# Altium PCB PCB.REV6.PcbDoc
Units mm, origin at the board's own origin, x right, y up, seen from the top; angles counter-clockwise.
Board outline 68.25 x 58.25 mm, 2 copper layers (Top Layer, Bottom Layer); 30 components, 21 nets, 87 pads, 1 vias.
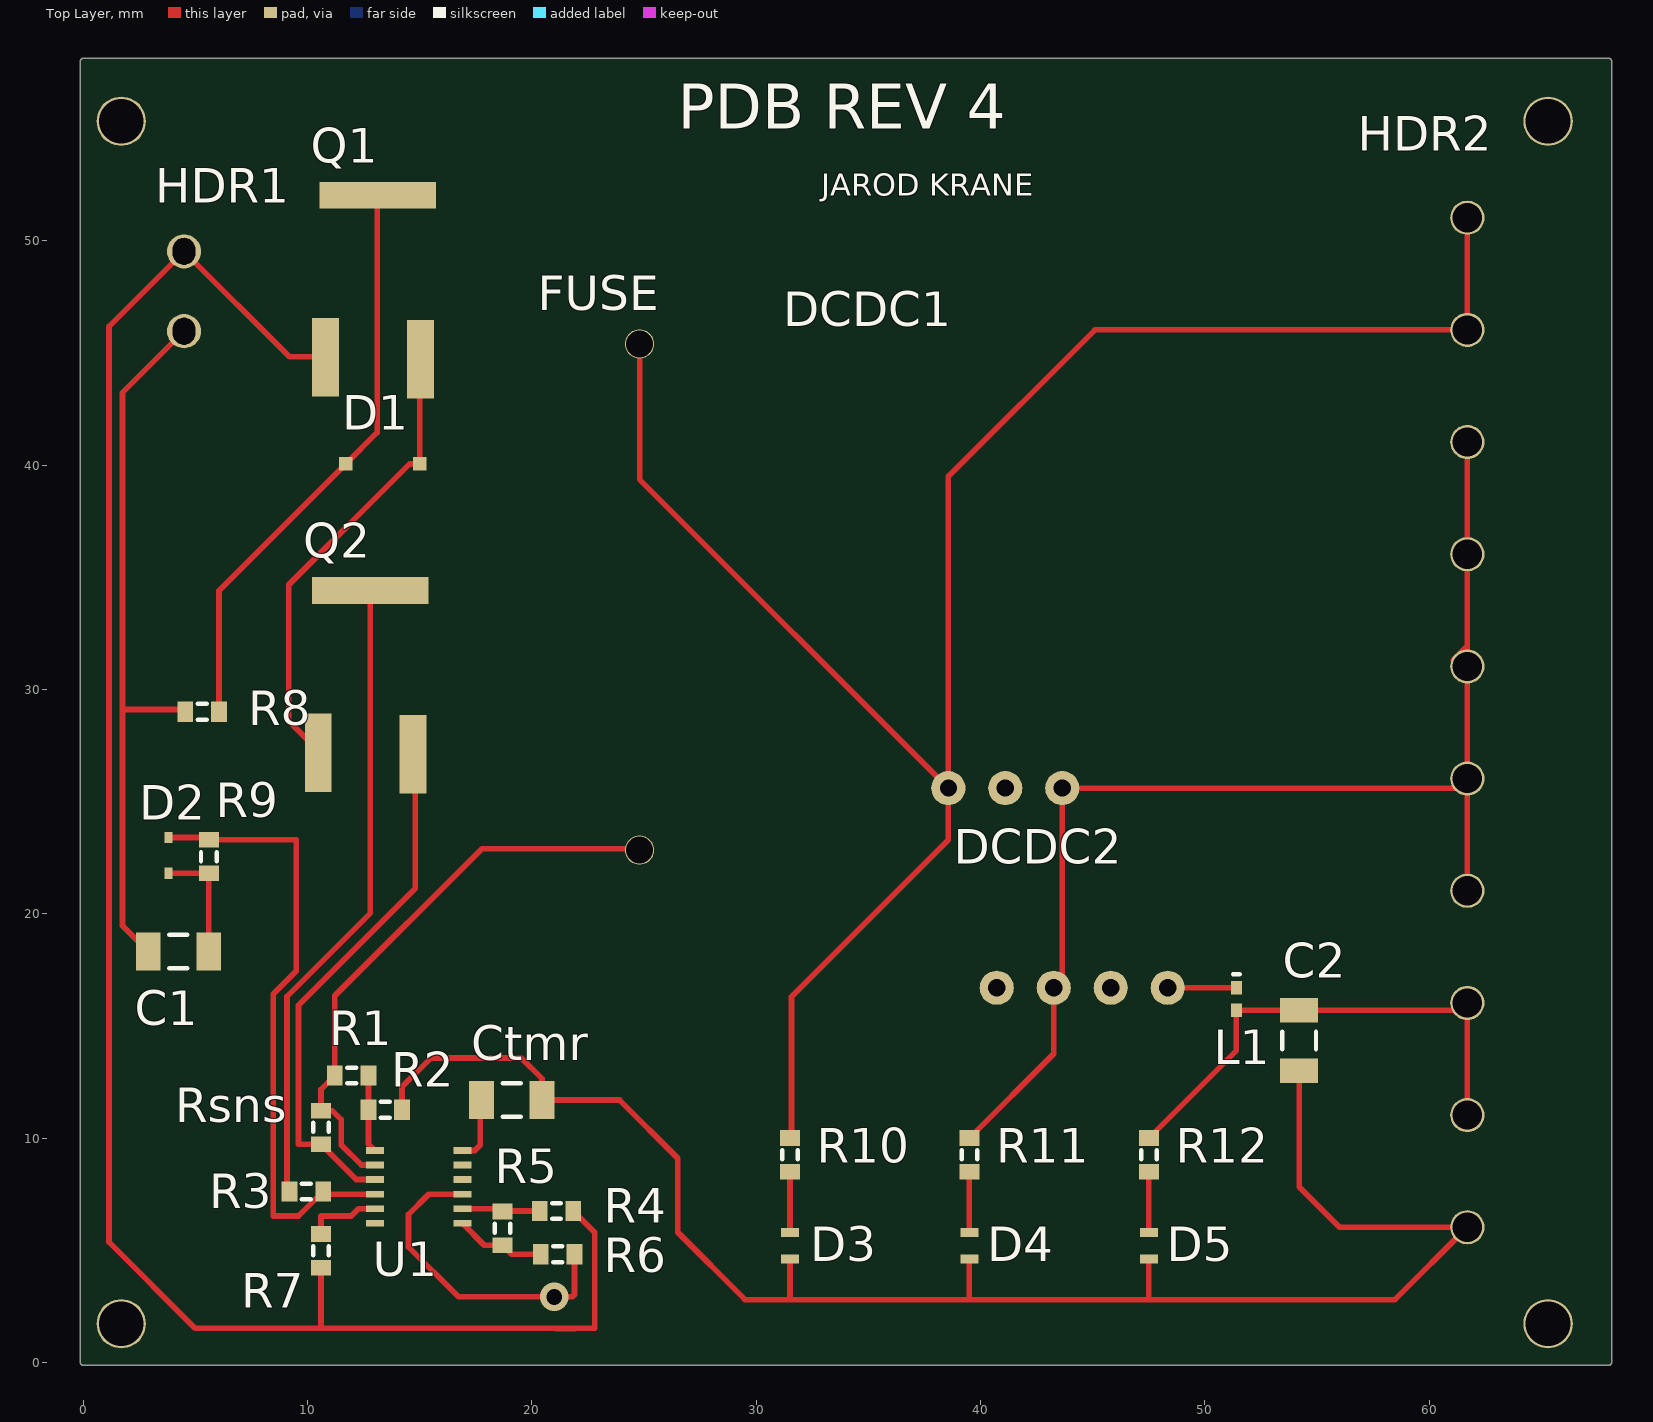
[diagram p0: Top Layer view]
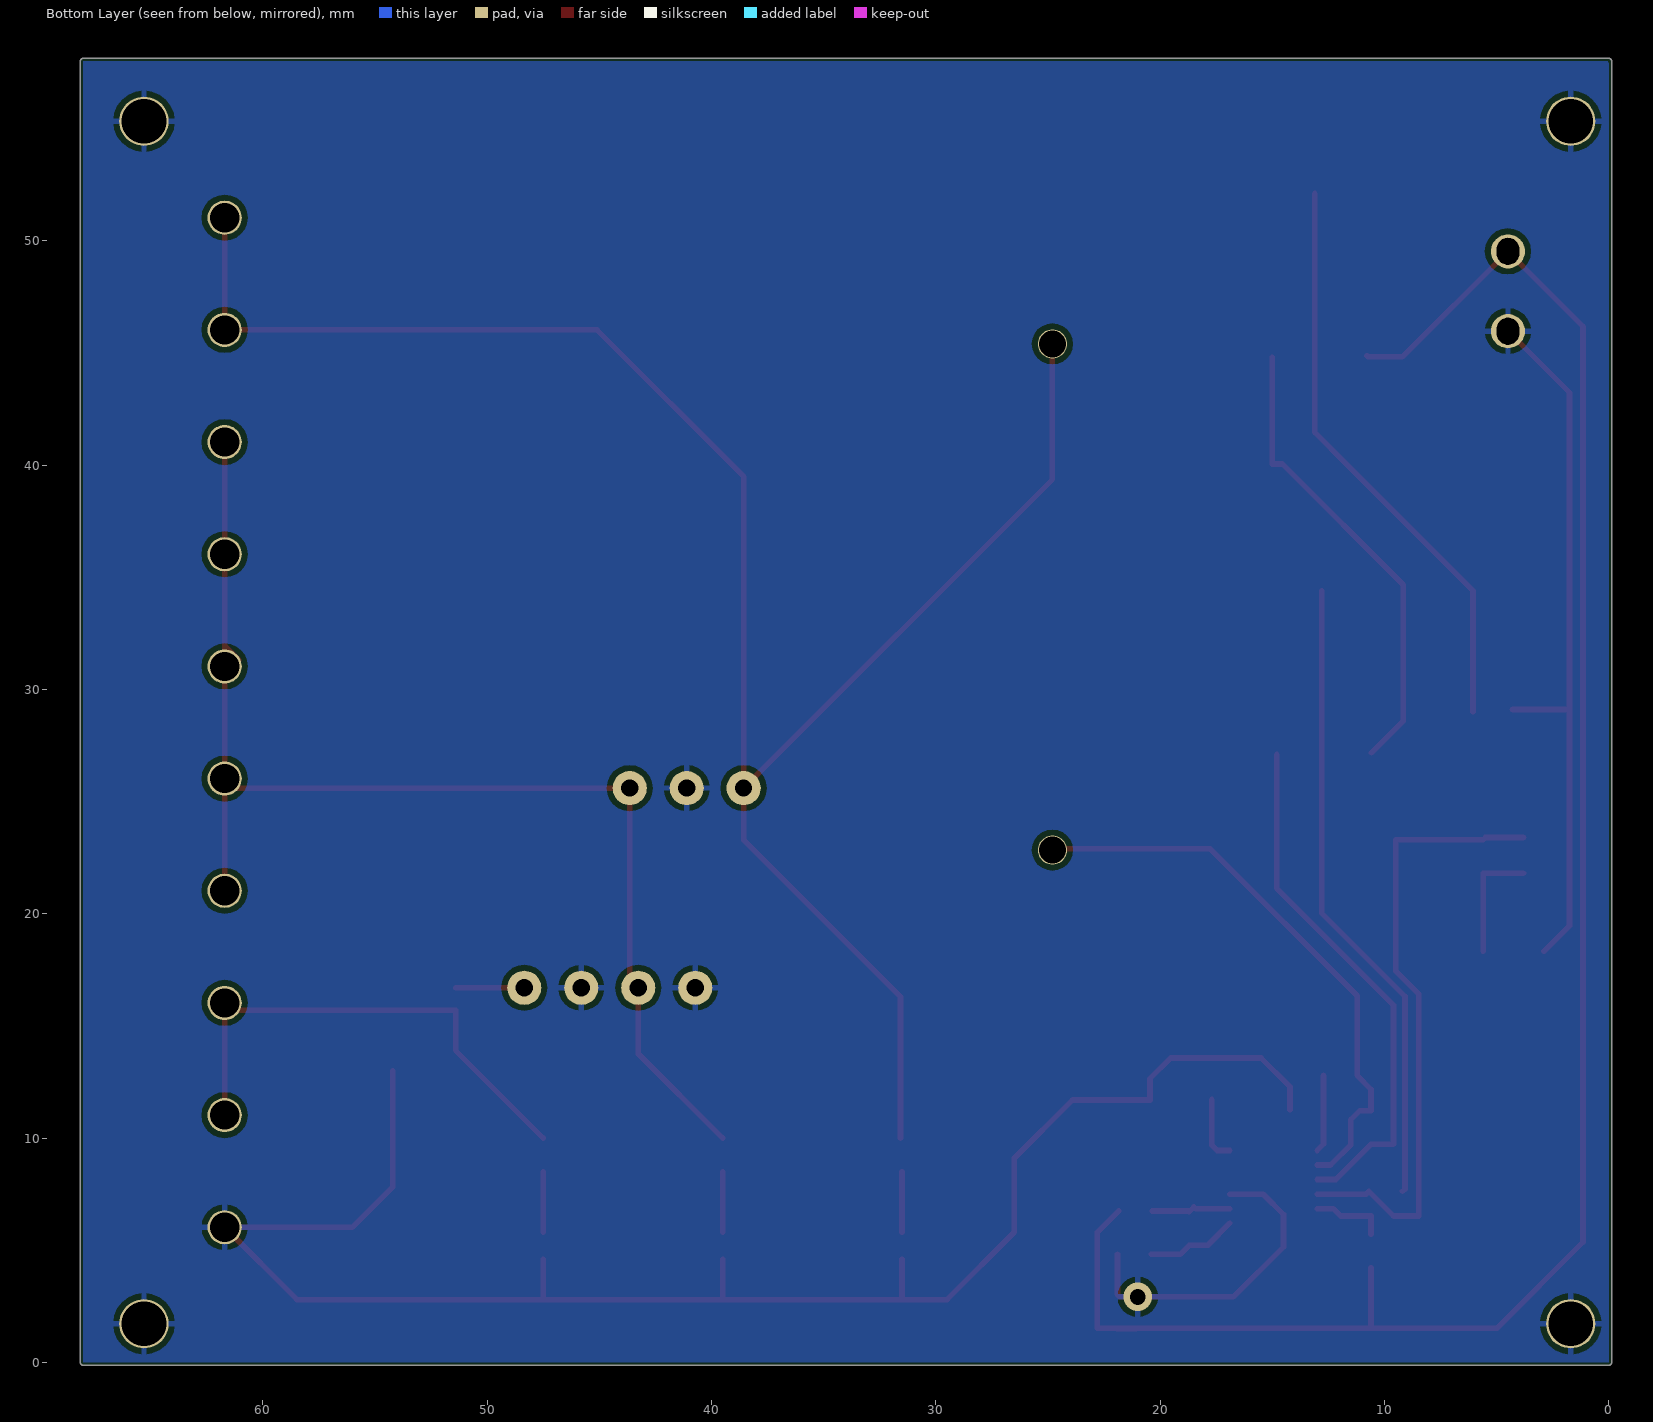
[diagram p1: Bottom Layer view, seen from below]

## Layer stack, top to bottom
Top Solder: solder mask 0.0102, Solder Resist, Dk 3.5
Top Layer: signal copper 0.0356
Dielectric 1: dielectric 0.32, FR-4, Dk 4.8
Bottom Layer: signal copper 0.0356
Bottom Solder: solder mask 0.0102, Solder Resist, Dk 3.5

## Board outline
0,-0.127 cw(c0,0) -0.127,0 -0.127,58 cw(c0,58) 0,58.127 68,58.127 cw(c68,58) 68.127,58 68.127,0 cw(c68,0) 68,-0.127

## Design rules (kind name [scope] priority, off if disabled: settings)
Clearance [All] p1: gap=0.254 ignorepadtopadclearanceinfootprint=FALSE except(0: Arc-Hole Track-Hole SMDPad-Hole THPad-Hole Via-Hole Fill-Hole Poly-Hole Region-Hole Text-Hole)
PolygonConnect [All] p1: connectstyle=Relief reliefconductorwidth=0.254 reliefentries=4 polygonreliefangle="90 Angle" airgapwidth=0.254
RoutingVias [All] p1: holewidth=0.711 width=1.27 viastyle="Through Hole" minholewidth=0.711 minwidth=1.27 maxholewidth=0.711 maxwidth=1.27
SolderMaskExpansion [All] p1: expansion=0.102
Width [All] p1: maxlimit=0.254 minlimit=0.254 preferedwidth=0.254
30 further rules are at their usual default settings.

## Components (designator, comment, footprint, x,y, rotation, side; value= is the part's Value field where it differs from the comment)
C1 "Cap Semi" C1206 4.245,18.324 r0 top value=100pF
C2 "Cap Semi" C1206 54.2,14.35 r90 top value=100pF
Ctmr "Cap Semi" C1206 19.1,11.7 r180 top value=100pF
D1 "D Zener" "ZENER DIODE" 14.7,39.3 r90 top
D2 "Diode" diode 3.4,22 r0 top
D3 "LED1" LED 31.9,6 r180 top
D4 "LED2" LED 39.9,6 r180 top
D5 "LED3" LED 47.9,6 r180 top
DCDC1 "DCDC1" DCDC1 31.448,23.568 r0 top
DCDC2 "DCDC2" DCDC2 38.561,15.43 r0 top
FUSE "FUSE" FUSE 28.737,22.2 r90 top
HDR1 "HDR1" HDR1 1.066,44.19 r0 top
HDR2 "HDR2" HDR2 56.595,3.524 r0 top
L1 "Inductor" 0402-A 51.4,16.2 r270 top value=10mH
Q1 "MOSFET-P" MOSFET 9.875,45.75 r0 top
Q2 "MOSFET-N" MOSFET 9.55,28.125 r0 top
R1 "" J1-0603 11.963,12.789 r0 top value=1K
R2 "" J1-0603 13.463,11.265 r0 top value=1K
R3 "" J1-0603 9.945,7.624 r0 top value=1K
R4 "" J1-0603 21.096,6.748 r0 top value=1K
R5 "" J1-0603 18.695,5.974 r90 top value=1K
R6 "" J1-0603 21.145,4.824 r180 top value=1K
R7 "" J1-0603 10.595,4.974 r90 top value=1K
R8 "" J1-0603 5.3,29 r0 top value=1K
R9 "" J1-0603 5.6,22.55 r90 top value=1K
R10 "" J1-0603 31.5,9.25 r90 top value=1K
R11 "" J1-0603 39.5,9.25 r90 top value=1K
R12 "" J1-0603 47.5,9.25 r90 top value=1K
Rsns "" J1-0603 10.595,10.474 r90 top value=1K
U1 "LT4363" LT4363 12.5,5.794 r0 top

## Footprints (in the part's own frame and the unit in brackets; to place one, negate y for a bottom-side part, rotate by r counter-clockwise, add the part's x,y. Pads: shape width x height; smd on the part's side, far side on the other; paste and mask are expansions set on the pad)
0402-A [mm] "Chip Inductor, Body 1.0x0.5mm, IPC High Density"
  rect 0.6x0.5 smd: 1(-0.5,0) 2(0.5,0)
  silkscreen extent -1.1,-0.15 -1.1,0.15, body extent -0.55,-0.3 0.55,0.3, height 0.55
C1206 [mm] "Chip Capacitor, Body 3.2x1.6mm, IPC High Density"
  rect 1.1x1.7 smd: 1(-1.35,0) 2(1.35,0)
  silkscreen extent -0.4,-0.75 0.4,0.75, body extent -1.7,-0.9 1.7,0.9, height 1.3
DCDC1 [mil]
  round 60 hole 30: 1(280,80) 2(380,80) 3(480,80)
  body extent -20,10 780,860, height 323
DCDC2 [mil]
  round 60 hole 30: 1(85,50) 2(185,50) 3(285,50) 4(385,50)
  body extent -1,0 452,237, height 298
diode [mm] "1N4148X"
  rect 0.35x0.5 smd: 1(0.4,1.4) 2(0.4,-0.2)
  body extent 0,0 0.8,1.2, height 0.6
FUSE [mm]
  round 1.3 hole 1.2: 1(0.635,3.937) 2(23.2,3.937)
  body extent 0.38,-0.86 23.48,8.74, height 11.6
HDR1 [mil]
  round 60 hole 39.37 slot 47.24 at 90 deg: 1(135,70) 2(135,210)
  body extent -2,0 285,280, height 335
HDR2 [mm]
  round 1.524 hole 1.3: 1(5.1,47.5) 2(5.1,42.5) 3(5.1,37.5) 4(5.1,32.5) 5(5.1,27.5) 6(5.1,22.5) 7(5.1,17.5) 8(5.1,12.5) 9(5.1,7.5) 10(5.1,2.5)
  body extent 0,0 9.91,50.01, height 14.6
J1-0603 [mm] "Chip Resistor, Body 1.6x0.8mm, IPC High Density"
  rect 0.7x0.9 smd: 1(-0.75,0) 2(0.75,0)
  silkscreen extent -0.2,-0.35 0.2,0.35, body extent -0.85,-0.48 0.85,0.48, height 0.9
LED [mm]
  rect 0.8x0.4 smd: 1(0.4,0.2) 2(0.4,1.4)
  body extent 0,0 0.8,1.6, height 0.51
LT4363 [mm]
  rect 0.8x0.3 smd: 1(0.5,3.656) 2(0.5,3.006) 3(0.5,2.356) 4(0.5,1.706) 5(0.5,1.056) 6(0.5,0.406) 7(4.4,0.406) 8(4.4,1.056) 9(4.4,1.706) 10(4.4,2.356) 11(4.4,3.006) 12(4.4,3.656)
  body extent 0.9,0 4,4.1, height 0.87
MOSFET [mm]
  rect 1.2x3.5 smd: 1(0.925,-0.95) 3(5.15,-1.025)
  rect 5.2x1.2 smd: 2(3.25,6.275)
  body extent 0,0.03 6.5,6, height 2.2
"ZENER DIODE" [mm] "BZT52C36-FDICT-ND"
  rect 0.6x0.6 smd: 1(0.75,3) 2(0.75,-0.3)
  body extent 0,0 1.5,2.7, height 1

## Part data
C1 C2 Ctmr: "Capacitor (Semiconductor SIM Model)", LatestRevisionDate=29-May-2009, LatestRevisionNote="IPC-7351 Footprint Added.", PackageDescription="Chip Capacitor", PackageReference=C1206, Published=8-Jun-2000, Publisher="Altium Limited"
D1: "Zener Diode", LatestRevisionDate=17-Jul-2002, LatestRevisionNote="Re-released for DXP Platform.", PackageDescription="Diode, Thru-Hole; 2 Leads; 0.7 in Pin Spacing", PackageReference=DIODE-0.7, Published=8-Jun-2000, Publisher="Altium Limited"
D2: "Default Diode", Code_JEDEC=DO-214-AB, LatestRevisionDate=17-Jul-2002, LatestRevisionNote="Re-released for DXP Platform.", PackageDescription="DO-214-AB/SMC; 2 C-Bend Leads; Body 7.9 x 5.9 mm, inc. leads (LxW)", PackageReference=SMC, PackageVersion=Sep-1996, Published=8-Jun-2000, Publisher="Altium Limited"
D3 D4: library part LED3, "Typical BLUE SiC LED", DatasheetVersion=16-Apr-2002, LatestRevisionDate=17-Dec-2003, LatestRevisionNote="PCB Footprint replaced.", PackageDescription="SM LED; 2 C-Bend Leads; Body 3.5 x 2.8 x 1.9 mm, inc leads (LxWxH typ)", PackageReference=3.5X2.8X1.9, PackageVersion=16-Apr-2002, Published=8-Jun-2000, Publisher="Altium Limited"
D5: "Typical BLUE SiC LED", DatasheetVersion=16-Apr-2002, LatestRevisionDate=17-Dec-2003, LatestRevisionNote="PCB Footprint replaced.", PackageDescription="SM LED; 2 C-Bend Leads; Body 3.5 x 2.8 x 1.9 mm, inc leads (LxWxH typ)", PackageReference=3.5X2.8X1.9, PackageVersion=16-Apr-2002, Published=8-Jun-2000, Publisher="Altium Limited"
Q1: "P-Channel MOSFET", LatestRevisionDate=17-Jul-2002, LatestRevisionNote="Re-released for DXP Platform.", PackageDescription="TO, Flat Index; 3 In-Line, Axial Leads; Body Dia. 4.6mm; Lead Dia. 0.5 mm (max)", PackageReference=E3, PackageVersion=1995/1996, Published=8-Jun-2000, Publisher="Altium Limited"
Q2: "N-Channel MOSFET", LatestRevisionDate=17-Jul-2002, LatestRevisionNote="Re-released for DXP Platform.", PackageDescription="TO, Flat Index; 3 In-Line, Axial Leads; Body Dia. 4.6mm; Lead Dia. 0.5 mm (max)", PackageReference=E3, PackageVersion=1995/1996, Published=8-Jun-2000, Publisher="Altium Limited"
R1 R2 R3 R4 R5 R6 R7 R8 R9 R10 R11 R12 Rsns: library part Res3, "Resistor", LatestRevisionDate=29-May-2009, LatestRevisionNote="IPC-7351 Footprint Added.", PackageDescription="Chip Resistor", PackageReference=J1-0603, Published=8-Jun-2000, Publisher="Altium Limited"
L1: Code_IEC=1005, Code_JEITA=0402, LatestRevisionDate=29-May-2009, LatestRevisionNote="IPC-7351 Footprint Added.", PackageDescription="Chip Inductor", PackageReference=0402-A, Published=8-Jun-2000, Publisher="Altium Limited"

## Free pads (board coordinates)
  round 2.2 hole 2: 1(1.695,1.724) 2(1.695,55.324) 3(65.295,55.324) 4(65.295,1.724)

## Via types
v1: diameter 1.27, hole 0.711, Top Layer to Bottom Layer, 1 vias

## Nets (pads, with @x,y where several pads share a name; then routed paths per layer and width w, separated by ;. In a path a pad name is that pad's centre, name@x,y a point inside that pad or via, vN(x,y) a via of type N, cw(c..) or ccw(c..) an arc to the next point about the centre after c; other vN are vias at no path point)
GND: C1.1 C2.1 Ctmr.1 D3.2 D4.2 D5.2 DCDC1.2 DCDC2.1 DCDC2.3 HDR1.1 HDR2.10 pad.1 pad.2 pad.3 pad.4 R2.2 R6.1 R8.1 U1.9 | length 122.3
  Top Layer w0.254: C1.1 1.754,19.465 1.754,29.1 ; R8.1@4.295,29.1 1.754,29.1 ; HDR1.1 1.754,43.227 1.754,29.1 ; R2.2 14.213,12.287 15.5,13.574 19.526,13.574 20.45,12.65 Ctmr.1 23.9,11.7 26.5,9.1 26.5,5.8 29.5,2.8 31.5,2.8 ; U1.9 15.4,7.5 14.5,6.6 14.5,5.148 16.724,2.924 v1(20.995,2.924) 21.795,2.924 21.895,3.024 R6.1 ; D3.2 31.5,2.8 ; D4.2 39.5,2.8 ; D5.2 47.5,2.8 ; C2.1 54.2,7.819 55.995,6.024 HDR2.10 58.471,2.8 47.5,2.8 ; 31.5,2.8 39.5,2.8 ; 39.5,2.8 47.5,2.8
NetC1_2: C1.2 D2.2 R9.1 | length 5.3
  Top Layer w0.254: D2.2 R9.1 5.6,18.329 C1.2
NetC2_2: C2.2 HDR2.8 HDR2.9 L1.2 R12.2 | length 22.7
  Top Layer w0.254: R12.2 51.4,13.9 L1.2 C2.2 61.371,15.7 HDR2.8 HDR2.9
NetCtmr_2: Ctmr.2 U1.12 | length 2.9
  Top Layer w0.254: U1.12 17.45,9.45 17.695,9.695 Ctmr.2@17.695,11.724
NetD1_1: D1.1 Q1.2 R8.2 | length 26
  Top Layer w0.254: R8.2 6.05,34.4 D1.1 13.1,41.45 Q1.2@13.1,52.1
NetD1_2: D1.2 Q1.3 Q2.1 | length 20.9
  Top Layer w0.254: Q2.1@10.575,27.175 9.161,28.589 9.161,34.661 14.55,40.05 D1.2 Q1.3@15,44.8
NetD2_1: D2.1 R3.2 R9.2 U1.4 | length 28
  Top Layer w0.254: D2.1 5.5,23.4 R9.2 9.495,23.3 9.495,17.442 8.464,16.411 8.464,6.524 9.595,6.524 R3.2 10.819,7.5 U1.4
NetD3_1: D3.1 R10.1 | length 2.7
  Top Layer w0.254: D3.1 R10.1
NetD4_1: D4.1 R11.1 | length 2.7
  Top Layer w0.254: D4.1 R11.1
NetD5_1: D5.1 R12.1 | length 2.7
  Top Layer w0.254: D5.1 R12.1
NetDCDC1_1: DCDC1.1 FUSE.2 HDR2.1 HDR2.2 R10.2 | length 88.7
  Top Layer w0.254: FUSE.2@24.8,45.365 24.8,39.36 DCDC1.1 ; R10.2@31.573,10 31.573,16.3 38.56,23.287 DCDC1.1 ; HDR2.1 HDR2.2 45.095,46.024 38.56,39.489 DCDC1.1
NetDCDC1_3: DCDC1.3 DCDC2.2 HDR2.3 HDR2.4 HDR2.5 HDR2.6 HDR2.7 R11.2 | length 56.4
  Top Layer w0.254: R11.2 43.26,13.76 DCDC2.2 43.64,17.08 DCDC1.3 61.271,25.6 HDR2.6 ; HDR2.5@61.071,31.3 61.695,31.924 ; HDR2.7 HDR2.6 ; HDR2.3 HDR2.4 61.695,31.924 ; HDR2.6 HDR2.5 61.695,31.924
NetDCDC2_4: DCDC2.4 L1.1 | length 3.1
  Top Layer w0.254: DCDC2.4 L1.1
NetFUSE_1: FUSE.1 R1.1 Rsns.2 U1.2 | length 25.6
  Top Layer w0.254: U1.2 12.401,8.8 11.495,9.706 11.495,10.824 11.095,11.224 Rsns.2 10.595,12.171 R1.1 11.213,16.342 17.771,22.9 FUSE.1@24.641,22.9
NetHDR1_2: HDR1.2 Q1.1 R4.2 R7.1 | length 85.4
  Top Layer w0.254: R7.1 10.595,1.524 ; Q1.1@10.775,44.875 10.725,44.825 9.194,44.825 HDR1.2 1.146,46.175 1.146,5.366 4.988,1.524 10.595,1.524 ; R4.2 22.795,5.799 22.795,1.524 21.932,1.524 21.916,1.508 21.074,1.508 21.058,1.524 10.595,1.524
NetQ2_2: Q2.2 R3.1 | length 28.4
  Top Layer w0.254: R3.1 9.087,7.732 9.087,16.316 12.8,20.029 Q2.2
NetQ2_3: Q2.3 Rsns.1 U1.3 | length 23.6
  Top Layer w0.254: U1.3 12.169,8.15 Rsns.1 9.595,9.724 9.595,15.924 14.8,21.129 Q2.3@14.8,27.1
NetR1_2: R1.2 R2.1 U1.1 | length 3.5
  Top Layer w0.254: R1.2 R2.1 12.713,9.737 U1.1
NetR4_1: R4.1 R5.2 U1.8 | length 3.6
  Top Layer w0.254: U1.8 18.421,6.85 18.495,6.924 R5.2 18.719,6.748 R4.1
NetR5_1: R5.1 R6.2 U1.7 | length 4.1
  Top Layer w0.254: U1.7 17.876,5.224 R5.1 19.095,4.824 R6.2
NetR7_2: R7.2 U1.5 | length 3.3
  Top Layer w0.254: R7.2 10.595,6.524 11.944,6.524 12.27,6.85 U1.5
pads on no net: U1.6 U1.10 U1.11

## Polygon pours and split planes (outlines as drawn)
GND on Bottom Layer "GND" (solid, pour order 18): 0,0 0,57.9 -0.1,58 68,58 68,0

## Silkscreen, mask and mechanical layers (free items; w line width, h text height)
Top Overlay:
  text "PDB REV 4" at 26.5,55 h2
  text "JAROD KRANE" at 32.9,52 h1